# Altium PCB DBL2.PcbDoc
Units mm, origin at the board's own origin, x right, y up, seen from the top; angles counter-clockwise.
Board outline 100 x 60 mm, 2 copper layers (Top Layer, Bottom Layer), stack 0.325 mm thick; 70 components, 40 nets, 188 pads, 1223 vias.
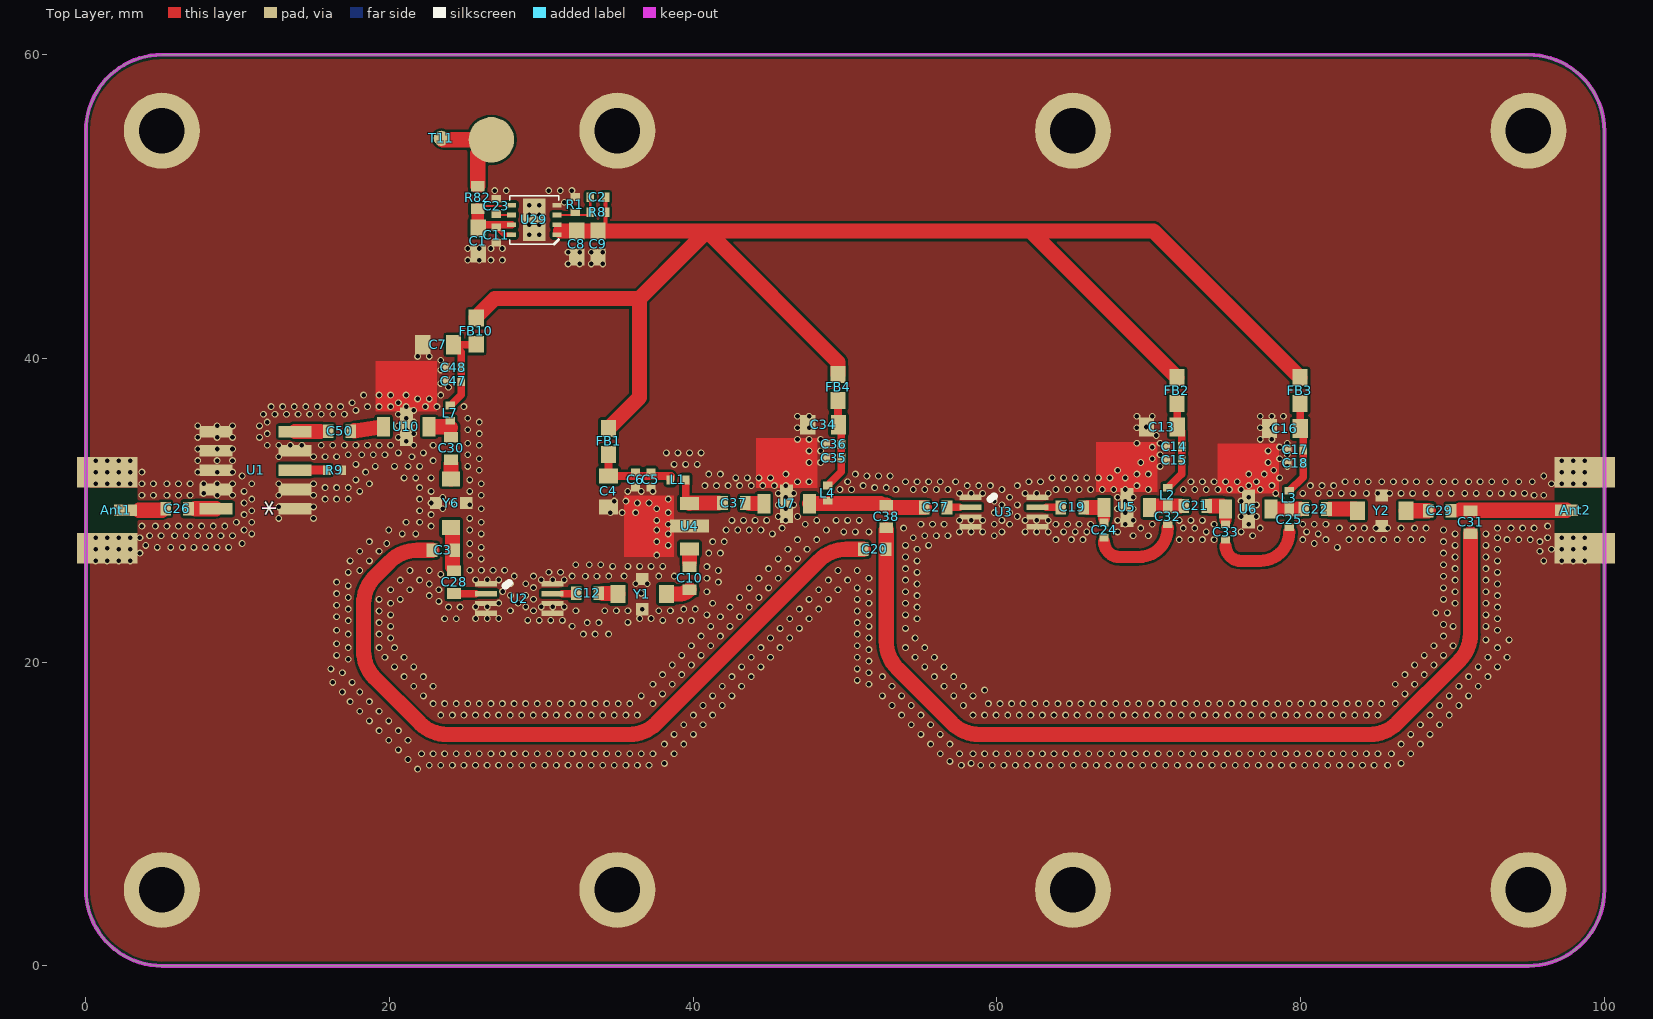
[diagram p0: Top Layer view]
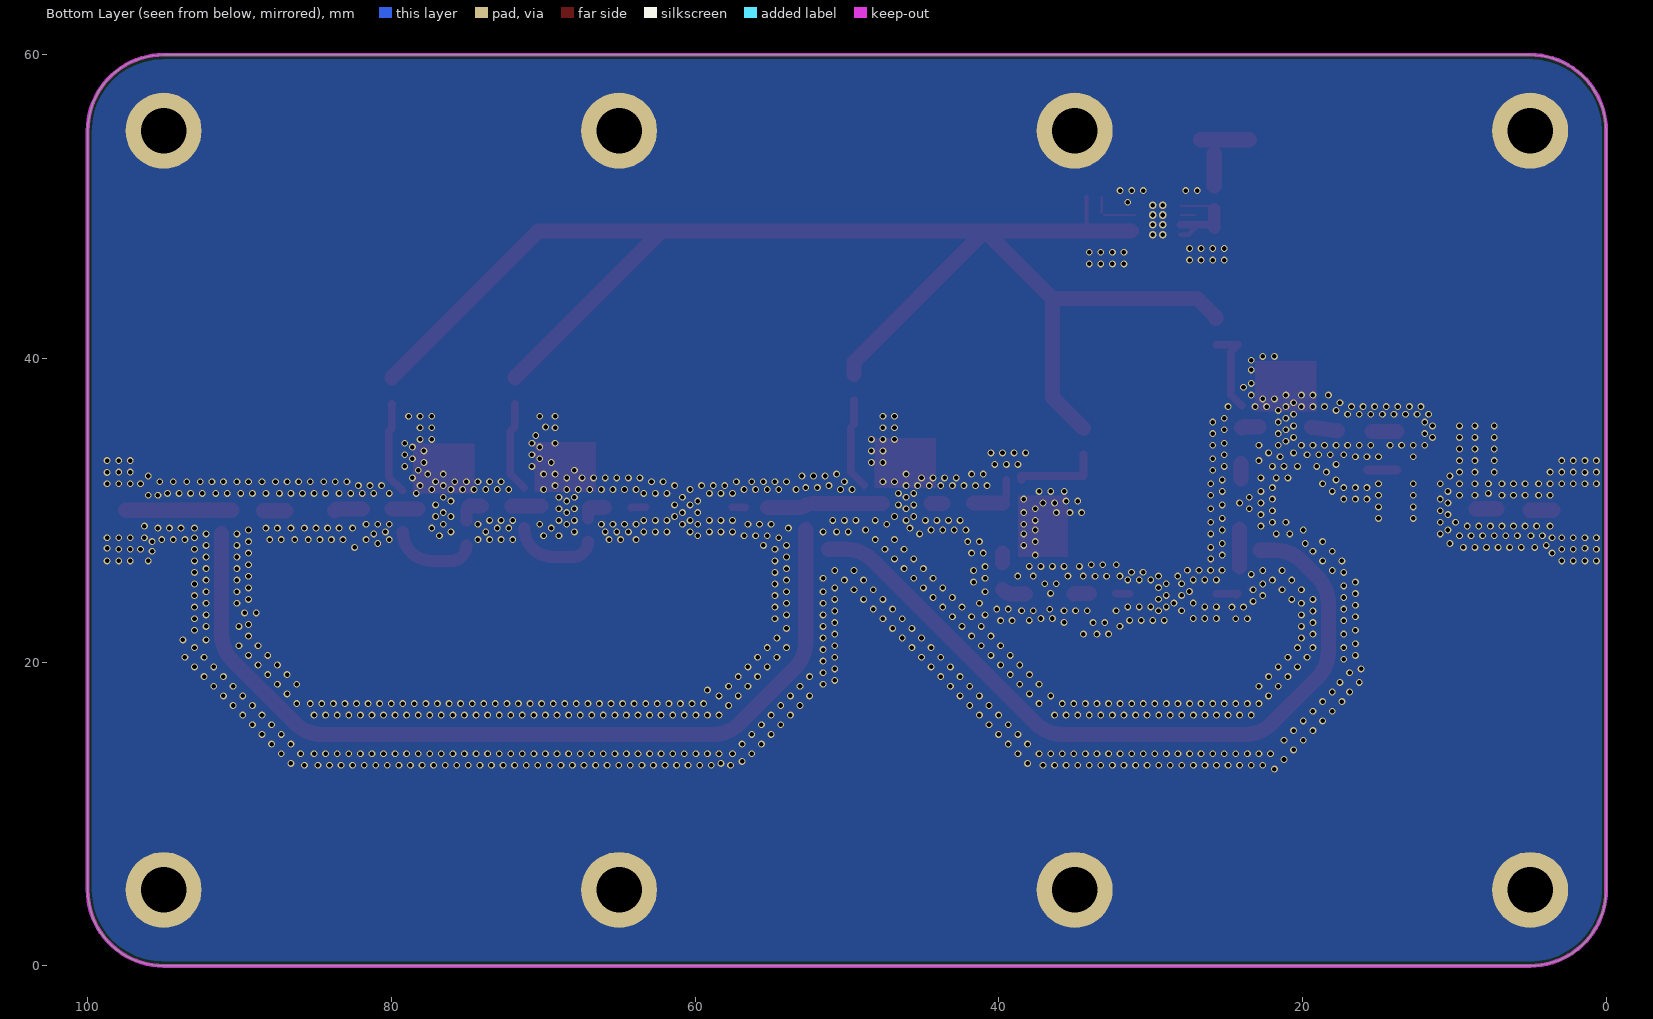
[diagram p1: Bottom Layer view, seen from below]

## Layer stack, top to bottom
Top Solder: solder mask 0.0102, Solder Resist, Dk 3.5
Top Layer: signal copper 0.0356
Dielectric 1: core 0.254, FR-4, Dk 4.2
Bottom Layer: signal copper 0.0356
Bottom Solder: solder mask 0.0102, Solder Resist, Dk 3.5

## Board outline
0,5 ccw(c5,5) 5,0 95,0 ccw(c95,5) 100,5 100,55 ccw(c95,55) 95,60 5,60 ccw(c5,55) 0,55

## Design rules (kind name [scope] priority, off if disabled: settings)
Clearance Clearance_1 [(InNamedPolygon('Bottom Layer-No Net')) vs Not InNet('GND')] p1: gap=0.152 ignorepadtopadclearanceinfootprint=FALSE
Clearance [All] p2: gap=0.152 ignorepadtopadclearanceinfootprint=FALSE except(0: Arc-Hole Track-Hole SMDPad-Hole THPad-Hole Via-Hole Fill-Hole Poly-Hole Region-Hole Text-Hole)
DiffPairsRouting [All] p1: maxlimit=0.254 minlimit=0.254 mostfreqgap=0.254 toplayer_minwidth=0.152 toplayer_maxwidth=0.381 toplayer_prefwidth=0.381 bottomlayer_minwidth=0.152 bottomlayer_maxwidth=0.381 bottomlayer_prefwidth=0.381 maxuncoupledlength=12.7
HoleSize [All] p1: absolutevalues=TRUE maxlimit=3.048 minlimit=0.025 maxpercent=80.000 minpercent=20.000
MinimumSolderMaskSliver [All] p1 off: minsoldermaskwidth=0.254
PlaneClearance [All] p1: clearance=0.254
PlaneConnect [All] p1: planeconnectstyle=Direct reliefexpansion=0.508 reliefentries=4 reliefconductorwidth=0.254 reliefairgap=0.254
PolygonConnect [All] p1: connectstyle=Direct reliefconductorwidth=0.254 reliefentries=4 polygonreliefangle="90 Angle" airgapwidth=0.254
RoomDefinition main [InComponentClass('main')] p1 off: confinementstyle=ConfineIn formatcopy=TRUE lockcomponents=FALSE outline -49.585,-47.954 9.978,-47.954 9.978,-41.858 -49.585,-41.858
RoutingVias [All] p1: holewidth=0.305 width=0.508 viastyle="Through Hole" minholewidth=0.3 minwidth=0.5 maxholewidth=0.711 maxwidth=1.27
SilkToBoardRegionClearance [All] p1 off:
SilkToSilkClearance [All] p1 off: silktosilkclearance=0.254
SilkToSolderMaskClearance [IsPad] p1 off: minsilkscreentomaskgap=0.254 clearancetoexposedcopper=TRUE
SolderMaskExpansion [All] p1: expansion=0.102
Width [All] p1: maxlimit=1.524 minlimit=0.152 preferedwidth=0.152
22 further rules are at their usual default settings.

## Classes and differential pairs
net class 50R: 2G 8G 8G+ 8G++ NetAnt2_1 NetC3_1 NetC12_1 NetC12_2 NetC22_1 NetC27_1 NetC30_1 NetC30_2

## Components (designator, comment, footprint, x,y, rotation, side; value= is the part's Value field where it differs from the comment)
Ant1 "Antenna" SMA-2 1.397,32.5 r270 top
Ant2 "Antenna" SMA-2 98.716,27.5 r90 top
C1 "2.2uF" 0603 25.825,47.725 r90 top
C2 "470nF" 0402 33.725,50.625 r180 top
C3 "1nF" 0603L 23.543,27.371 r180 top
C4 "12nF" 0805 34.417,31.242 r90 top
C5 "1nF" 0402 37.211,32.004 r90 top
C6 "100pF" 0402 36.195,32.004 r90 top
C7 "12nF" 0805 23.2,40.9 r0 top
C8 "0.1uF" 0603 32.325,47.525 r90 top
C9 "2.2uF" 0603 33.725,47.525 r90 top
C10 "1nF" 0603L 39.751,25.527 r90 top
C11 "0.1uF" 0402 27.025,48.125 r90 top
C12 "1nF" 0603L 33.03,24.527 r0 top
C13 "12nF" 0805 70.855,35.485 r0 top
C14 "1nF" 0402 71.655,34.185 r0 top
C15 "100pF" 0402 71.655,33.285 r0 top
C16 "12nF" 0805 78.955,35.385 r0 top
C17 "1nF" 0402 79.655,33.985 r0 top
C18 "100pF" 0402 79.655,33.085 r0 top
C19 "1nF" 0603L 64.955,30.185 r0 top
C20 "1nF" 0603L 51.943,27.432 r0 top
C21 "1nF" 0603L 73.055,30.285 r0 top
C22 "1nF" 0603L 80.955,30.085 r0 top
C23 "470nF" 0402 27.025,50.025 r270 top
C24 "NC" 0402 67.056,28.702 r270 top
C25 "NC" 0402 79.255,29.385 r90 top
C26 "1nF" 0603L 6,30.1 r0 top
C27 "1nF" 0603L 55.955,30.185 r0 top
C28 "1nF" 0603L 24.243,25.271 r270 top
C29 "1nF" 0603L 89.154,29.972 r0 top
C30 "1nF" 0603L 24.043,34.071 r270 top
C31 "1nF" 0603L 91.186,29.21 r90 top
C32 "NC" 0402 71.255,29.585 r90 top
C33 "NC" 0402 75.057,28.575 r270 top
C34 "12nF" 0805 48.549,35.639 r0 top
C35 "1nF" 0402 49.249,33.439 r0 top
C36 "100pF" 0402 49.249,34.339 r0 top
C37 "1nF" 0603L 42.672,30.48 r0 top
C38 "1nF" 0603L 52.705,29.591 r270 top
C47 "1nF" 0402 24.2,38.5 r0 top
C48 "100pF" 0402 24.2,39.4 r0 top
C50 "1nF" 0603L 16.7,35.2 r0 top
FB1 "FB" 0603 34.417,34.544 r270 top
FB2 "FB" 0603 71.855,37.885 r270 top
FB3 "FB" 0603 79.955,37.885 r270 top
FB4 "FB" 0603 49.53,38.1 r270 top
FB10 "FB" 0603 25.7,41.8 r270 top
L1 "Inductor" 0402 38.989,32.004 r0 top value=10nH
L2 "Inductor" 0402 71.255,30.985 r270 top value=10nH
L3 "Inductor" 0402 79.255,30.785 r270 top value=10nH
L4 "Inductor" 0402 48.849,31.139 r270 top value=10nH
L7 "Inductor" 0402 24,36.4 r270 top value=10nH
R1 "10k" 0402 32.225,50.125 r90 top value=0Ohm
R8 "6.25k" 0402 33.725,49.625 r180 top value=0Ohm
R9 "49.9R" 0402 16.388,32.642 r180 top value=0Ohm
R82 "FB" 0603L 25.8,50.6 r90 top value=0Ohm
T11 "TestPad" "TestPad - 1mm" 23.4,54.5 r0 top
U1 "KC2-11+" DZ885 11.232,32.642 r90 top
U2 "HMC189" MSOP8/VSSOP8 28.534,24.186 r0 top
U3 "HMC189" MSOP8/VSSOP8 60.455,29.885 r0 top
U4 "AMP-SOT89" SOT-89 39.751,28.956 r90 top
U5 "AMP-SOT89" SOT-89 68.555,30.185 r0 top
U6 "AMP-SOT89" SOT-89 76.555,30.085 r0 top
U7 "AMP-SOT89" SOT-89 46.149,30.439 r0 top
U10 "AMP-SOT89" SOT-89 21.1,35.5 r0 top
U29 "TPS7A8101" TPS7A8101 29.525,49.125 r180 top
Y1 "BFCN-4100" 1748LP18A075 36.633,24.486 r0 top
Y2 "BFCN-1945+" 1748LP18A075 85.344,29.972 r0 top
Y6 "BFCN-1945+" 1748LP18A075 24.043,30.471 r270 top

## Footprints (in the part's own frame and the unit in brackets; to place one, negate y for a bottom-side part, rotate by r counter-clockwise, add the part's x,y. Pads: shape width x height; smd on the part's side, far side on the other; paste and mask are expansions set on the pad)
0402 [mil] "0402-RES"
  rect 20x24 smd: 1(-19.68,0) 2(20,0)
0603 [mil] "0603-RES"
  rect 44x40 smd: 1(-33.46,0) 2(34,0)
  body extent -31,-16 31,16, height 31
0603L [mm]
  rect 0.7x0.9 smd: 1(-0.75,0) 2(0.75,0)
  body extent -0.8,-0.4 0.8,0.4, height 0.8
0805 [mm]
  rect 1x1.27 smd: 1(-1.016,0) 2(1.016,0)
  body extent -1.27,-0.76 1.27,0.76, height 0.8
1748LP18A075 [mm]
  rect 1x1.2 smd: 1(-1.6,0) 2(1.6,0)
  rect 0.8x0.8 smd: 3(0,-1) 4(0,1)
  body extent -1.6,-0.8 1.6,0.8, height 1
DZ885 [mil]
  rect 30x85 smd: 1(-100,-100) 2(-50,-100) 3(0,-100) 4(50,-100) 5(100,-100) 6(100,105) 7(50,105) 8(0,105) 9(-50,105) 10(-100,105)
  body extent -151,-125 151,125, height 87
MSOP8/VSSOP8 [mm]
  rect 1.45x0.35 smd: 1(-2.2,0.975) 2(-2.2,0.325) 3(-2.2,-0.325) 4(-2.2,-0.975) 5(2.2,-0.975) 6(2.2,-0.325) 7(2.2,0.325) 8(2.2,0.975)
  silkscreen extent -0.9,0.85 -0.65,1.05
SMA-2 [mm]
  rect 0.75x1.5 smd: 1(2.5,1.2)
  rect 2x4 smd: GND(0,0) GND(5,0)
  Top Layer pour cut-out: 1,2 4,2 4,-2 1,-2
SOT-89 [mil]
  rect 34x50 smd: 1(-59.06,0) 3(59.06,0)
  rect 34x100 smd: 2(0,0)
  Top Layer region: -80,40 80,40 80,170 -80,170
  body extent -89,-22 89,147, height 59
"TestPad - 1mm" [mm]
  round 1 smd: 1(0,0)
TPS7A8101 [mm]
  rect 1.5x2.8 smd: 0(0,0)
  rect 0.6x0.3 smd: 1(-1.5,0.975) 2(-1.5,0.325) 3(-1.5,-0.325) 4(-1.5,-0.975) 5(1.5,-0.975) 6(1.5,-0.325) 7(1.5,0.325) 8(1.5,0.975)
  silkscreen extent -1.6,-1.6 1.6,1.6, body extent -1.5,-1.5 1.5,1.5, height 0.6

## Part data
C1 C3 C4 C5 C6 C7 C8 C9 C10 C11 C12 C13 C14 C15 C16 C17 C18 C19 C20 C21 C22 C23 C24 C25 C26 C27 C28 C29 C30 C31 C32 C33 C34 C35 C36 C37 C38 C47 C48 C50: library part CAP0402-CAP, "<b>Capacitor</b> / Standard 0603 ceramic capacitor, and 0.1\" leaded capacitor.", PARTNO=CC0402ZRY5V7BB104
C2: library part Cap, "Capacitor", LatestRevisionDate=17-Jul-2002, LatestRevisionNote="Re-released for DXP Platform.", PackageDescription="Radial Cap, Thru-Hole; 2 Leads; 0.3 in Pin Spacing", PackageReference=RAD-0.3, Published=8-Jun-2000, Publisher="Altium Limited"
FB1 FB2 FB3 FB4 FB10 R1 R8 R9 R82: library part Res2, "Resistor", LatestRevisionDate=17-Jul-2002, LatestRevisionNote="Re-released for DXP Platform.", PackageDescription="Axial Device, Thru-Hole; 2 Leads; 0.4 in Pin Spacing", PackageReference=AXIAL-0.4, Published=8-Jun-2000, Publisher="Altium Limited"
Y1 Y2 Y6: library part 1748LP18A075
L1 L2 L3 L4 L7: Code_IEC=1005, Code_JEITA=0402, LatestRevisionDate=29-May-2009, LatestRevisionNote="IPC-7351 Footprint Added.", PackageDescription="Chip Inductor", PackageReference=0402-A, Published=8-Jun-2000, Publisher="Altium Limited"

## Free pads (board coordinates)
  round 5 hole 3: 1(5,5) 2(5,55) 3(35,55) 4(65,55) 5(95,55) 6(95,5) 7(65,5) 8(35,5)
  round 3 smd: 11(26.7,54.4)

## Via types
v1: diameter 0.45, hole 0.3, Top Layer to Bottom Layer, 1215 vias
v2: diameter 0.5, hole 0.3, Top Layer to Bottom Layer, 8 vias

## Nets (pads, with @x,y where several pads share a name; then routed paths per layer and width w, separated by ;. In a path a pad name is that pad's centre, name@x,y a point inside that pad or via, vN(x,y) a via of type N, cw(c..) or ccw(c..) an arc to the next point about the centre after c; other vN are vias at no path point)
2G: C50.1 U1.5 | length 1.6
  Top Layer w1: U1.5 15.418,35.182
4G++: C10.1 Y1.2 | length 1.6
  Top Layer w1: Y1.2 39.048,24.486 ccw(c39.048,25.48) C10.1
5V: C2.1 C8.2 C9.2 FB1.1 FB2.1 FB3.1 FB4.1 FB10.1 R8.1 U29.1 U29.2 | length 108.5
  Top Layer w0.254: C9.2@34.225,48.454 R8.1 C2.1
  Top Layer w1: FB10.1 25.7,42.718 26.924,43.942 36.447,43.942 ; 31.267,48.389 C8.2 C9.2 40.894,48.389 ; FB1.1 36.447,37.424 36.447,43.942 ; FB4.1 49.53,39.753 40.894,48.389 ; FB2.1 62.201,48.389 ; FB3.1 70.301,48.389 62.201,48.389 ; 36.447,43.942 40.894,48.389 ; 40.894,48.389 62.201,48.389
8G: C19.1 U3.7 | length 1
  Top Layer w0.5: U3.7@63.246,30.21 64.18,30.21 cw(c64.18,30.185) C19.1
8G+: C21.1 C32.2 L2.2 U5.3 | length 1.9
  Top Layer w1: U5.3@70.155,30.285 C21.1@72.055,30.285
8G++: C22.2 Y2.1 | length 1.9
  Top Layer w1: C22.2@81.915,30.085 83.471,30.085 cw(c83.471,29.699) Y2.1
GND: Ant1.GND Ant2.GND C1.1 C4.1 C5.1 C6.1 C7.1 C8.1 C9.1 C11.1 C13.1 C14.1 C15.1 C16.1 C17.1 C18.1 C23.1 C34.1 C35.1 C36.1 C47.1 C48.1 pad.1 pad.2 pad.3 pad.4 pad.5 pad.6 pad.7 pad.8 R1.2 R9.1 U1.1 U1.2 U1.4 U1.6 U1.7 U1.8 U1.9 U2.1 U2.3 U2.4 U2.5 U2.6 U2.8 U3.1 U3.3 U3.4 U3.5 U3.6 U3.8 U4.2 U5.2 U6.2 U7.2 U10.2 U29.0 U29.4 Y1.3 Y1.4 Y2.3 Y2.4 Y6.3 Y6.4
  other v1: 21.844,12.954 22.606,13.208 23.368,13.208 24.13,13.208 24.892,13.208 25.654,13.208 26.416,13.208 27.178,13.208 27.94,13.208 28.702,13.208 29.464,13.208 30.226,13.208 30.988,13.208 31.75,13.208 32.512,13.208 33.274,13.208 34.036,13.208 34.798,13.208 35.56,13.208 36.322,13.208 37.084,13.208 57.658,13.208 58.928,13.208 59.69,13.208 60.452,13.208 61.214,13.208 61.976,13.208 62.738,13.208 63.5,13.208 64.262,13.208 65.024,13.208 65.786,13.208 66.548,13.208 67.31,13.208 68.072,13.208 68.834,13.208 69.596,13.208 70.358,13.208 71.12,13.208 71.882,13.208 72.644,13.208 73.406,13.208 74.168,13.208 74.93,13.208 75.692,13.208 76.454,13.208 77.216,13.208 77.978,13.208 78.74,13.208 79.502,13.208 80.264,13.208 81.026,13.208 81.788,13.208 82.55,13.208 83.312,13.208 84.074,13.208 84.836,13.208 85.725,13.208 38.1,13.335 58.293,13.335 86.614,13.335 56.896,13.462 21.209,13.589 22.098,13.97 22.86,13.97 23.622,13.97 24.384,13.97 25.146,13.97 25.908,13.97 26.67,13.97 27.432,13.97 28.194,13.97 28.956,13.97 29.718,13.97 30.48,13.97 31.242,13.97 32.004,13.97 32.766,13.97 33.528,13.97 34.29,13.97 35.052,13.97 35.814,13.97 36.576,13.97 37.338,13.97 38.735,13.97 56.261,13.97 57.531,13.97 58.42,13.97 59.182,13.97 59.944,13.97 60.706,13.97 61.468,13.97 62.23,13.97 62.992,13.97 63.754,13.97 64.516,13.97 65.278,13.97 66.04,13.97 66.802,13.97 67.564,13.97 68.326,13.97 69.088,13.97 69.85,13.97 70.612,13.97 71.374,13.97 72.136,13.97 72.898,13.97 73.66,13.97 74.422,13.97 75.184,13.97 75.946,13.97 76.708,13.97 77.47,13.97 78.232,13.97 78.994,13.97 79.756,13.97 80.518,13.97 81.28,13.97 82.042,13.97 82.804,13.97 83.566,13.97 84.328,13.97 85.09,13.97 85.979,13.97 87.249,13.97 20.574,14.224 38.1,14.605 39.37,14.605 55.626,14.605 56.896,14.605 86.614,14.605 87.884,14.605 19.939,14.859 21.209,14.859 38.735,15.24 40.005,15.24 54.991,15.24 56.261,15.24 87.249,15.24 88.519,15.24 19.304,15.494 20.574,15.494 39.37,15.875 40.64,15.875 54.356,15.875 55.626,15.875 87.884,15.875 89.154,15.875 18.669,16.129 19.939,16.129 23.368,16.51 24.13,16.51 24.892,16.51 25.654,16.51 26.416,16.51 27.178,16.51 27.94,16.51 28.702,16.51 29.464,16.51 30.226,16.51 30.988,16.51 31.75,16.51 32.512,16.51 33.274,16.51 34.036,16.51 34.798,16.51 35.56,16.51 36.322,16.51 40.005,16.51 41.275,16.51 53.721,16.51 54.991,16.51 58.42,16.51 59.182,16.51 59.944,16.51 60.706,16.51 61.468,16.51 62.23,16.51 62.992,16.51 63.754,16.51 64.516,16.51 65.278,16.51 66.04,16.51 66.802,16.51 67.564,16.51 68.326,16.51 69.088,16.51 69.85,16.51 70.612,16.51 71.374,16.51 72.136,16.51 72.898,16.51 73.66,16.51 74.422,16.51 75.184,16.51 75.946,16.51 76.708,16.51 77.47,16.51 78.232,16.51 78.994,16.51 79.756,16.51 80.518,16.51 81.28,16.51 82.042,16.51 82.804,16.51 83.566,16.51 84.328,16.51 85.09,16.51 88.519,16.51 89.789,16.51 18.034,16.764 19.304,16.764 40.64,17.145 41.91,17.145 53.086,17.145 54.356,17.145 57.785,17.145 89.154,17.145 90.424,17.145 22.86,17.272 23.622,17.272 24.384,17.272 25.146,17.272 25.908,17.272 26.67,17.272 27.432,17.272 28.194,17.272 28.956,17.272 29.718,17.272 30.48,17.272 31.242,17.272 32.004,17.272 32.766,17.272 33.528,17.272 34.29,17.272 35.052,17.272 35.814,17.272 37.338,17.272 59.436,17.272 60.198,17.272 60.96,17.272 61.722,17.272 62.484,17.272 63.246,17.272 64.008,17.272 64.77,17.272 65.532,17.272 66.294,17.272 67.056,17.272 67.818,17.272 68.58,17.272 69.342,17.272 70.104,17.272 70.866,17.272 71.628,17.272 72.39,17.272 73.152,17.272 73.914,17.272 74.676,17.272 75.438,17.272 76.2,17.272 76.962,17.272 77.724,17.272 78.486,17.272 79.248,17.272 80.01,17.272 80.772,17.272 81.534,17.272 82.296,17.272 83.058,17.272 83.82,17.272 84.582,17.272 85.344,17.272 86.233,17.272 17.399,17.399 18.669,17.399 22.225,17.78 36.576,17.78 41.275,17.78 42.545,17.78 52.451,17.78 53.721,17.78 57.15,17.78 58.42,17.78 89.789,17.78 91.059,17.78 37.973,17.907 86.868,17.907 16.891,18.034 18.034,18.034 59.182,18.161 21.59,18.415 22.86,18.415 41.91,18.415 43.18,18.415 53.086,18.415 56.515,18.415 57.785,18.415 90.424,18.415 91.694,18.415 37.338,18.542 38.608,18.542 51.562,18.542 86.233,18.542 87.503,18.542 16.256,18.669 17.526,18.669 50.8,18.796 20.955,19.05 22.225,19.05 42.545,19.05 43.815,19.05 52.451,19.05 55.88,19.05 57.15,19.05 91.059,19.05 92.329,19.05 37.973,19.177 39.243,19.177 86.868,19.177 88.138,19.177 16.891,19.304 51.562,19.304 16.129,19.558 50.8,19.558 20.32,19.685 21.59,19.685 43.18,19.685 44.45,19.685 55.245,19.685 56.515,19.685 91.694,19.685 92.964,19.685 38.608,19.812 39.878,19.812 87.503,19.812 88.773,19.812 51.562,20.066 17.272,20.193 19.685,20.32 20.955,20.32 43.815,20.32 45.085,20.32 50.8,20.32 54.61,20.32 55.88,20.32 92.329,20.32 93.599,20.32 16.51,20.447 39.243,20.447 40.513,20.447 88.138,20.447 89.408,20.447 51.562,20.828 17.272,20.955 19.304,20.955 20.32,20.955 44.45,20.955 45.72,20.955 53.975,20.955 55.245,20.955 92.964,20.955 39.878,21.082 41.148,21.082 50.8,21.082 88.773,21.082 90.043,21.082 16.51,21.209 92.202,21.463 93.726,21.463 20.066,21.59 45.085,21.59 46.355,21.59 51.562,21.59 54.61,21.59 40.513,21.717 41.783,21.717 89.408,21.717 17.272,21.844 19.304,21.844 32.766,21.844 33.528,21.844 34.417,21.844 50.8,21.844 16.51,22.098 92.964,22.098 45.72,22.225 46.99,22.225 53.975,22.225 20.066,22.352 41.148,22.352 42.418,22.352 51.562,22.352 90.043,22.352 92.202,22.352 32.014,22.368 89.408,22.479 19.304,22.606 33.02,22.606 33.782,22.606 50.8,22.606 35.697,22.622 17.272,22.733 39.116,22.733 39.878,22.733 29.093,22.749 29.855,22.749 30.617,22.749 31.379,22.749 37.983,22.749 23.622,22.86 24.384,22.86 46.355,22.86 47.625,22.86 54.737,22.86 92.964,22.86 25.664,22.876 26.426,22.876 27.188,22.876 36.459,22.876 37.221,22.876 16.51,22.987 41.783,22.987 43.053,22.987 20.066,23.114 40.894,23.114 51.562,23.114 53.975,23.114 92.202,23.114 88.9,23.241 89.662,23.241 19.304,23.368 50.8,23.368 27.95,23.384 29.474,23.384 32.268,23.384 34.173,23.384 34.935,23.384 35.697,23.384 37.729,23.384 38.491,23.384 17.272,23.495 36.633,23.486 39.37,23.495 40.132,23.495 46.99,23.495 48.26,23.495 23.876,23.622 24.638,23.622 42.418,23.622 43.688,23.622 54.737,23.622 92.964,23.622 25.664,23.638 26.426,23.638 28.966,23.638 29.982,23.638 30.744,23.638 31.506,23.638 16.51,23.749 20.066,23.876 41.275,23.876 51.562,23.876 53.975,23.876 90.17,23.876 92.202,23.876 27.188,23.892 28.458,23.892 23.241,24.003 19.304,24.13 20.701,24.13 47.625,24.13 48.895,24.13 50.8,24.13 89.408,24.13 29.474,24.146 17.272,24.257 43.053,24.257 44.323,24.257 22.606,24.384 54.737,24.384 92.964,24.384 27.95,24.4 28.966,24.4 16.51,24.511 36.586,24.527 40.894,24.638 51.562,24.638 53.975,24.638 90.17,24.638 92.202,24.638 27.442,24.654 20.066,24.765 21.336,24.765 23.241,24.765 48.26,24.765 49.53,24.765 43.688,24.892 44.958,24.892 50.8,24.892 89.408,24.892 29.474,24.908 17.272,25.019 22.606,25.146 54.737,25.146 92.964,25.146 27.95,25.162 28.966,25.162 36.205,25.162 36.967,25.162 16.51,25.273 41.656,25.273 20.701,25.4 21.971,25.4 48.895,25.4 50.165,25.4 53.975,25.4 90.17,25.4 92.202,25.4 25.664,25.416 26.426,25.416 27.188,25.416 29.982,25.416 30.744,25.416 31.506,25.416 40.894,25.527 44.323,25.527 45.593,25.527 51.562,25.527 32.893,25.654 33.655,25.654 89.408,25.654 28.204,25.67 29.474,25.67 32.014,25.67 34.427,25.67 35.443,25.67 37.729,25.67 38.745,25.67 23.368,25.781 17.272,25.908 54.737,25.908 92.964,25.908 30.49,25.924 31.252,25.924 18.034,26.035 21.336,26.035 22.606,26.035 41.656,26.035 49.53,26.035 50.8,26.035 25.283,26.051 26.045,26.051 26.807,26.051 27.569,26.051 44.958,26.162 46.228,26.162 53.975,26.162 90.17,26.162 92.202,26.162 40.894,26.289 34.681,26.305 35.697,26.305 36.459,26.305 37.221,26.305 37.983,26.305 32.258,26.416 33.147,26.416 33.909,26.416 89.408,26.416 0.635,26.67 1.397,26.67 2.159,26.67 2.921,26.67 17.399,26.67 18.669,26.67 54.737,26.67 92.964,26.67 96.012,26.67 97.192,26.67 97.954,26.67 98.716,26.67 26.035,26.797 45.593,26.797 46.863,26.797 53.975,26.924 90.17,26.924 92.202,26.924 25.273,27.051 37.592,27.051 3.556,27.178 41.021,27.178 41.783,27.178 89.408,27.178 18.034,27.305 19.304,27.305 95.758,27.305 0.635,27.432 2.159,27.432 2.921,27.432 46.228,27.432 47.498,27.432 54.737,27.432 92.964,27.432 96.52,27.432 97.192,27.432 97.954,27.432 1.397,27.5 98.716,27.5 4.699,27.559 5.588,27.559 6.35,27.559 7.112,27.559 7.874,27.559 8.636,27.559 9.398,27.559 26.035,27.559 82.423,27.559 3.937,27.686 38.354,27.686 53.975,27.686 55.499,27.686 90.17,27.686 92.202,27.686 10.287,27.813 19.812,27.813 25.273,27.813 80.899,27.813 18.669,27.94 37.592,27.94 41.275,27.94 42.037,27.94 89.408,27.94 95.758,27.94 46.863,28.067 48.133,28.067 63.881,28.067 64.897,28.067 65.659,28.067 72.009,28.067 72.771,28.067 73.533,28.067 74.295,28.067 80.137,28.067 81.661,28.067 83.185,28.067 83.947,28.067 84.709,28.067 85.471,28.067 86.36,28.067 87.249,28.067 88.011,28.067 93.599,28.067 94.361,28.067 95.123,28.067 0.635,28.194 1.397,28.194 2.159,28.194 2.921,28.194 3.556,28.194 54.483,28.194 92.964,28.194 96.266,28.194 97.192,28.194 97.954,28.194 98.716,28.194 4.191,28.321 4.953,28.321 5.842,28.321 6.604,28.321 7.366,28.321 8.128,28.321 8.89,28.321 9.652,28.321 55.245,28.321 56.007,28.321 56.769,28.321 59.817,28.321 68.961,28.321 69.977,28.321 76.835,28.321 10.922,28.448 20.828,28.448 21.717,28.448 26.035,28.448 38.354,28.448 45.212,28.448 81.153,28.448 90.17,28.448 92.202,28.448 49.911,28.575 50.673,28.575 51.562,28.575 57.531,28.575 58.293,28.575 59.055,28.575 60.325,28.575 61.849,28.575 62.611,28.575 63.373,28.575 64.389,28.575 65.151,28.575 65.913,28.575 67.945,28.575 73.787,28.575 76.073,28.575 80.391,28.575 10.414,28.702 19.939,28.702 25.273,28.702 37.592,28.702 42.164,28.702 42.926,28.702 43.688,28.702 44.45,28.702 48.768,28.702 89.408,28.702 45.847,28.829 53.848,28.829 69.469,28.829 72.263,28.829 73.025,28.829 77.343,28.829 82.55,28.829 83.439,28.829 84.201,28.829 84.963,28.829 85.725,28.829 86.614,28.829 87.503,28.829 88.265,28.829 92.964,28.829 93.853,28.829 94.615,28.829 95.377,28.829 3.683,28.956 4.572,28.956 5.334,28.956 6.096,28.956 6.858,28.956 7.62,28.956 8.382,28.956 9.144,28.956 22.733,28.956 96.266,28.956 38.354,29.083 47.371,29.083 54.991,29.083 55.753,29.083 56.515,29.083 59.817,29.083 60.833,29.083 63.881,29.083 64.643,29.083 65.405,29.083 66.167,29.083 68.453,29.083 70.231,29.083 74.295,29.083 76.581,29.083 80.137,29.083 80.899,29.083 81.661,29.083 9.906,29.21 10.922,29.21 21.082,29.21 21.971,29.21 26.035,29.21 37.592,29.337 42.545,29.337 43.307,29.337 44.069,29.337 44.831,29.337 46.101,29.337 48.133,29.337 49.403,29.337 50.165,29.337 50.927,29.337 57.531,29.337 58.293,29.337 59.055,29.337 60.325,29.337 61.849,29.337 62.611,29.337 63.373,29.337 67.945,29.337 68.961,29.337 72.009,29.337 72.771,29.337 73.533,29.337 12.7,29.464 14.986,29.464 25.273,29.464 45.593,29.591 46.863,29.591 61.341,29.591 76.073,29.591 77.089,29.591 10.414,29.718 22.733,29.718 34.544,29.845 35.306,29.845 36.195,29.845 38.354,29.845 59.817,29.845 60.833,29.845 68.453,29.845 76.581,29.845 10.922,29.972 21.971,29.972 23.495,30.099 26.035,30.099 37.592,30.099 46.101,30.099 67.945,30.099 68.961,30.099 12.7,30.226 14.986,30.226 25.273,30.353 45.593,30.353 46.609,30.353 60.325,30.353 61.341,30.353 77.089,30.353 10.414,30.48 22.733,30.48 24.13,30.48 36.322,30.48 37.084,30.48 34.798,30.607 35.56,30.607 59.817,30.607 68.453,30.607 76.073,30.607 10.922,30.734 15.748,30.734 16.51,30.734 17.272,30.734 21.971,30.734 38.354,30.734 23.495,30.861 46.101,30.861 60.833,30.861 67.945,30.861 68.961,30.861 76.581,30.861 3.683,30.988 4.445,30.988 5.334,30.988 6.096,30.988 6.858,30.988 8.636,30.988 9.652,30.988 12.7,30.988 14.986,30.988 26.035,30.988 95.377,30.988 96.012,30.988 7.747,31.115 45.593,31.115 46.609,31.115 57.531,31.115 58.293,31.115 59.055,31.115 61.849,31.115 62.611,31.115 63.373,31.115 78.359,31.115 80.137,31.115 81.153,31.115 81.915,31.115 82.677,31.115 83.439,31.115 84.328,31.115 85.09,31.115 85.852,31.115 86.614,31.115 87.376,31.115 88.265,31.115 89.154,31.115 89.916,31.115 90.805,31.115 91.567,31.115 92.456,31.115 93.218,31.115 93.98,31.115 94.742,31.115 10.414,31.242 18.034,31.242 22.733,31.242 25.273,31.242 35.687,31.242 36.576,31.242 37.338,31.242 49.657,31.369 50.419,31.369 53.34,31.369 54.483,31.369 55.245,31.369 56.007,31.369 56.769,31.369 60.325,31.369 63.881,31.369 64.643,31.369 65.405,31.369 66.167,31.369 66.929,31.369 67.691,31.369 68.453,31.369 69.977,31.369 72.263,31.369 73.025,31.369 73.787,31.369 74.549,31.369 75.311,31.369 76.073,31.369 77.343,31.369 15.748,31.496 16.51,31.496 17.272,31.496 21.971,31.496 51.943,31.496 52.705,31.496 40.767,31.623 41.529,31.623 42.291,31.623 43.053,31.623 43.815,31.623 44.577,31.623 45.339,31.623 46.101,31.623 51.181,31.623 58.039,31.623 58.801,31.623 59.563,31.623 61.341,31.623 69.215,31.623 76.581,31.623 78.105,31.623 80.645,31.623 81.407,31.623 82.169,31.623 0.635,31.75 1.397,31.75 2.159,31.75 2.921,31.75 3.683,31.75 4.445,31.75 5.334,31.75 6.096,31.75 6.858,31.75 7.747,31.75 8.636,31.75 9.652,31.75 10.922,31.75 12.7,31.75 14.986,31.75 18.669,31.75 26.035,31.75 96.52,31.75 97.192,31.75 97.954,31.75 98.716,31.75 46.863,31.877 47.625,31.877 50.165,31.877 53.975,31.877 54.737,31.877 55.499,31.877 56.261,31.877 57.277,31.877 62.103,31.877 62.865,31.877 72.771,31.877 73.533,31.877 74.295,31.877 75.057,31.877 75.819,31.877 77.089,31.877 82.931,31.877 83.693,31.877 84.455,31.877 85.344,31.877 86.106,31.877 86.868,31.877 87.63,31.877 88.519,31.877 89.408,31.877 90.17,31.877 91.059,31.877 91.821,31.877 92.583,31.877 93.472,31.877 94.361,31.877 95.25,31.877 17.78,32.004 25.273,32.004 20.955,32.131 21.717,32.131 22.733,32.131 42.799,32.131 43.561,32.131 44.323,32.131 45.085,32.131 63.627,32.131 64.389,32.131 65.151,32.131 65.913,32.131 66.675,32.131 67.437,32.131 68.453,32.131 78.613,32.131 10.287,32.258 51.435,32.258 52.197,32.258 52.959,32.258 96.012,32.258 41.021,32.385 41.783,32.385 46.101,32.385 50.673,32.385 69.215,32.385 69.977,32.385 76.581,32.385 77.597,32.385 1.397,32.5 98.716,32.5 0.635,32.512 2.159,32.512 2.921,32.512 3.683,32.512 7.366,32.512 8.636,32.512 9.652,32.512 18.415,32.512 97.192,32.512 97.954,32.512 25.908,32.639 67.945,32.639 78.232,32.639 19.05,32.893 20.32,32.893 21.209,32.893 21.971,32.893 25.146,32.893 70.739,32.893 79.121,32.893 17.78,33.02 38.735,33.02 39.497,33.02 40.259,33.02 47.625,33.147 48.387,33.147 69.469,33.147 77.851,33.147 0.635,33.274 1.397,33.274 2.159,33.274 2.921,33.274 7.366,33.274 8.636,33.274 9.652,33.274 22.86,33.274 97.192,33.274 97.954,33.274 98.716,33.274 25.908,33.401 70.231,33.401 78.613,33.401 12.7,33.528 14.986,33.528 15.748,33.528 16.51,33.528 21.463,33.528 17.272,33.655 18.161,33.655 18.923,33.655 19.685,33.655 25.146,33.655 70.739,33.655 79.121,33.655 20.574,33.782 22.225,33.782 38.227,33.782 38.989,33.782 39.751,33.782 40.513,33.782 47.625,33.909 48.387,33.909 77.851,33.909 7.366,34.036 8.636,34.036 9.652,34.036 70.231,34.163 78.613,34.163 11.938,34.29 12.7,34.29 13.462,34.29 14.224,34.29 15.494,34.29 16.256,34.29 17.018,34.29 17.78,34.29 18.542,34.29 19.304,34.29 20.066,34.29 21.59,34.29 22.86,34.29 25.908,34.29 25.146,34.417 69.215,34.417 70.739,34.417 79.121,34.417 21.082,34.544 46.863,34.671 47.625,34.671 48.387,34.671 77.343,34.671 78.105,34.671 7.366,34.798 8.636,34.798 9.652,34.798 11.43,34.798 20.574,34.798 70.485,34.925 11.938,35.052 21.59,35.052 25.908,35.052 21.082,35.306 25.146,35.306 46.863,35.433 47.625,35.433 69.215,35.433 77.343,35.433 78.105,35.433 69.839,35.485 7.366,35.56 8.636,35.56 9.652,35.56 11.43,35.56 20.574,35.56 11.938,35.814 21.59,35.814 25.908,35.814 21.082,36.068 25.146,36.068 46.863,36.195 47.625,36.195 69.215,36.195 70.231,36.195 77.343,36.195 78.105,36.195 78.867,36.195 11.684,36.322 12.446,36.322 13.208,36.322 13.97,36.322 14.732,36.322 15.494,36.322 16.256,36.322 17.018,36.322 20.574,36.322 17.78,36.576 21.59,36.576 12.192,36.83 12.954,36.83 13.716,36.83 14.478,36.83 15.24,36.83 16.002,36.83 16.764,36.83 18.542,36.83 19.304,36.83 20.066,36.83 21.082,36.83 22.352,36.83 23.114,36.83 24.892,36.83 17.526,37.084 20.574,37.084 21.844,37.338 22.606,37.338 18.288,37.592 19.304,37.592 20.066,37.592 21.082,37.592 23.368,37.592 23.876,38.1 23.368,38.354 23.368,39.243 23.368,39.878 21.844,40.132 22.606,40.132 31.75,46.228 32.512,46.228 33.274,46.228 34.036,46.228 25.146,46.482 25.908,46.482 26.67,46.482 27.432,46.482 31.75,46.99 32.512,46.99 33.274,46.99 34.036,46.99 25.146,47.244 25.908,47.244 26.67,47.244 27.432,47.244 31.496,50.292 26.924,51.054 27.686,51.054 30.48,51.054 31.242,51.054 32.004,51.054
  other v2: 29.2,48.15 29.85,48.15 29.2,48.8 29.85,48.8 29.2,49.45 29.85,49.45 29.2,50.1 29.85,50.1
NetAnt1_1: Ant1.1 C26.1 | length 1.5
  Top Layer w1: 3.486,30 C26.1@5,30
NetAnt2_1: Ant2.1 C29.2 C31.2 | length 7
  Top Layer w1: 90.488,30 Ant2.1
NetC1_2: C1.2 C11.2 R82.1 U29.5 U29.7 U29.8 | length 6.5
  Top Layer w0.152: R82.1@25.992,50.042 28.025,50.042 U29.5
  Top Layer w0.3: C11.2 27.508,48.15 U29.8
  Top Layer w0.5: C1.2@26.036,48.8 U29.7
  Top Layer w0.8: C1.2@25.8,48.614 R82.1
NetC2_2: C2.2 R1.1 R8.2 U29.3 | length 3
  Top Layer w0.152: U29.3 R8.2@33.042,49.45 ; R8.2 C2.2
NetC3_1: C3.1 C28.1 Y6.2 | length 2.5
  Top Layer w1: C28.1@24.143,26.271 Y6.2@24.143,28.771
NetC3_2: C3.2 C20.1 | length 49.9
  Top Layer w1: C3.2 21.819,27.371 ccw(c21.819,24.831) 20.023,26.627 19.032,25.636 ccw(c20.828,23.84) 18.288,23.84 18.288,20.737 ccw(c20.828,20.737) 19.032,18.941 21.989,15.984 ccw(c23.785,17.78) 23.785,15.24 35.778,15.24 ccw(c35.778,17.78) 37.574,15.984 48.278,26.688 cw(c50.074,24.892) 50.074,27.432 C20.1
NetC4_2: C4.2 C5.2 C6.2 FB1.2 L1.1 | length 5.8
  Top Layer w0.5: FB1.2 C4.2 38.534,32.258 38.534,32.113 cw(c38.38,32.113) L1.1
NetC7_2: C7.2 C47.2 C48.2 FB10.2 L7.1 | length 5.9
  Top Layer w0.5: L7.1 24.708,37.608 C47.2 C48.2 24.708,40.408 C7.2 FB10.2@25.664,40.9
NetC10_2: C10.2 U4.1 | length 0.6
  Top Layer w1: C10.2@39.751,26.543 U4.1@39.751,27.178
NetC12_1: C12.1 U2.7 | length 0.9
  Top Layer w0.5: U2.7@31.369,24.511 32.241,24.511 ccw(c32.241,24.566) C12.1
NetC12_2: C12.2 Y1.1 | length 1
  Top Layer w1: C12.2@34.036,24.527 34.934,24.527 cw(c34.934,24.387) Y1.1
NetC13_2: C13.2 C14.2 C15.2 FB2.2 L2.1 | length 6
  Top Layer w0.5: L2.1 72.163,32.393 C15.2 C14.2 72.163,35.193 C13.2 71.871,36.983 ccw(c71.816,36.983) FB2.2
NetC16_2: C16.2 C17.2 C18.2 FB3.2 L3.1 | length 5.9
  Top Layer w0.5: L3.1 80.163,32.193 C18.2 C17.2 C16.2@80.163,35.193 ; FB3.2 cw(c79.916,36.983) 79.971,36.983 C16.2
NetC19_2: C19.2 C24.1 U5.1 | length 1.6
  Top Layer w0.8: 67.056,29.464 U5.1@67.056,30.184
  Top Layer w1: C19.2@65.955,30.185 U5.1@66.855,30.185
NetC21_2: C21.2 C33.1 U6.1 | length 1.5
  Top Layer w0.8: 75.057,29.337 U6.1@75.057,30.083
  Top Layer w1: C21.2@74.055,30.285 U6.1@74.855,30.285
NetC22_1: C22.1 C25.2 L3.2 U6.3 | length 1.7
  Top Layer w1: U6.3@78.255,30.085 C22.1@79.955,30.085
NetC23_2: C23.2 U29.6 | length 0.9
  Top Layer w0.152: C23.2@27.092,49.45 U29.6
NetC24_2: C24.2 C32.1 | length 5.9
  Top Layer w0.8: C24.2@67.056,27.94 ccw(c68.072,27.94) 68.072,26.924 69.342,26.924 ccw(c69.342,28.829) 71.247,28.829
NetC25_1: C25.1 C33.2 | length 5.8
  Top Layer w0.8: 75.057,27.664 ccw(c76.051,27.664) 76.051,26.67 77.343,26.67 ccw(c77.343,28.575) 79.248,28.575
NetC26_2: C26.2 U1.10 | length 1.4
  Top Layer w1: 7.202,30.102 U1.10
NetC27_1: C27.1 C38.1 L4.2 U7.3 | length 7.2
  Top Layer w1: U7.3 C38.1@52.324,30.439 ; C38.1 ccw(c53.082,30.718) 53.082,30.185 C27.1
NetC27_2: C27.2 U3.2 | length 0.9
  Top Layer w0.5: C27.2@56.73,30.21 ccw(c56.73,30.185) C27.2 cw(c56.765,30.125) 56.765,30.21 U3.2@57.531,30.21
NetC28_2: C28.2 U2.2 | length 1.3
  Top Layer w0.5: C28.2 cw(c24.243,24.396) C28.2@24.368,24.396 ; C28.2@24.509,24.511 U2.2@25.654,24.511
NetC29_1: C29.1 Y2.2 | length 1.5
  Top Layer w1: Y2.2 C29.1
NetC30_1: C30.1 L7.2 U10.3 | length 1.2
  Top Layer w1: U10.3@22.86,35.5 23.841,35.5 cw(c23.841,35.271) 24.003,35.433
NetC30_2: C30.2 Y6.1 | length 1
  Top Layer w1: Y6.1 C30.2@24.043,33.071
NetC34_2: C34.2 C35.2 C36.2 FB4.2 L4.1 | length 5.8
  Top Layer w0.5: L4.1 49.757,32.547 C35.2 C36.2 C34.2@49.757,35.447 ; FB4.2 49.53,35.723 ccw(c49.65,35.723) C34.2
NetC37_1: C37.1 L1.2 U4.3 | length 3.5
  Top Layer w0.5: L1.2 39.497,31.069 ccw(c40.364,31.069) U4.3
  Top Layer w1: U4.3 cw(c39.809,30.398) 39.809,30.48 C37.1@41.656,30.48
NetC37_2: C37.2 U7.1 | length 0.8
  Top Layer w1: C37.2@43.688,30.439 U7.1@44.45,30.439
NetC50_2: C50.2 U10.1 | length 1.7
  Top Layer w1: C50.2@17.695,35.234 U10.1@19.404,35.473
NetR9_2: R9.2 U1.3 | length 1.9
  Top Layer w0.6: U1.3 R9.2@15.7,32.642
NetR82_2: pad.11 R82.2 T11.1 | length 5.3
  Top Layer w1: T11.1@23.5,54.4 pad.11 ; R82.2 pad.11@25.8,53.5
OUT: C20.2 C31.1 C38.2 | length 58.5
  Top Layer w1: C38.2@52.705,28.714 52.705,21.372 ccw(c55.245,21.372) 53.449,19.576 57.041,15.984 ccw(c58.837,17.78) 58.837,15.24 84.546,15.24 ccw(c84.546,17.78) 86.342,15.984 90.442,20.084 ccw(c88.646,21.88) 91.186,21.88 C31.1

## Polygon pours and split planes (outlines as drawn)
GND on Bottom Layer "GND_L02_P000" (solid, remove dead copper, pour order 0): -2.5,62.4 -2.1,62 104.1,62 104.1,3.8 96.2,-4.1 93.8,-1.7 -0.6,-1.7
GND on Top Layer "GND_L01_P002" (solid, remove dead copper, pour order 2): 0,5 ccw(c5,5) 5,0 95,0 ccw(c95,5) 100,5 100,55 ccw(c95,55) 95,60 5,60 ccw(c5,55) 0,55

## Keep-outs
Keep-Out Layer:
  the board outline again, w0.254

## Text inside footprints (layer, text, board x,y; h text height)
U1: Top Overlay "*" at 10.978,29.594 h1.52 r270